# Altium PCB EE209_PCB.PcbDoc
Units mm, origin at the board's own origin, x right, y up, seen from the top; angles counter-clockwise.
Board outline 81.89 x 77.5 mm, 2 copper layers (Top Layer, Bottom Layer); 47 components, 37 nets, 169 pads, 0 vias.
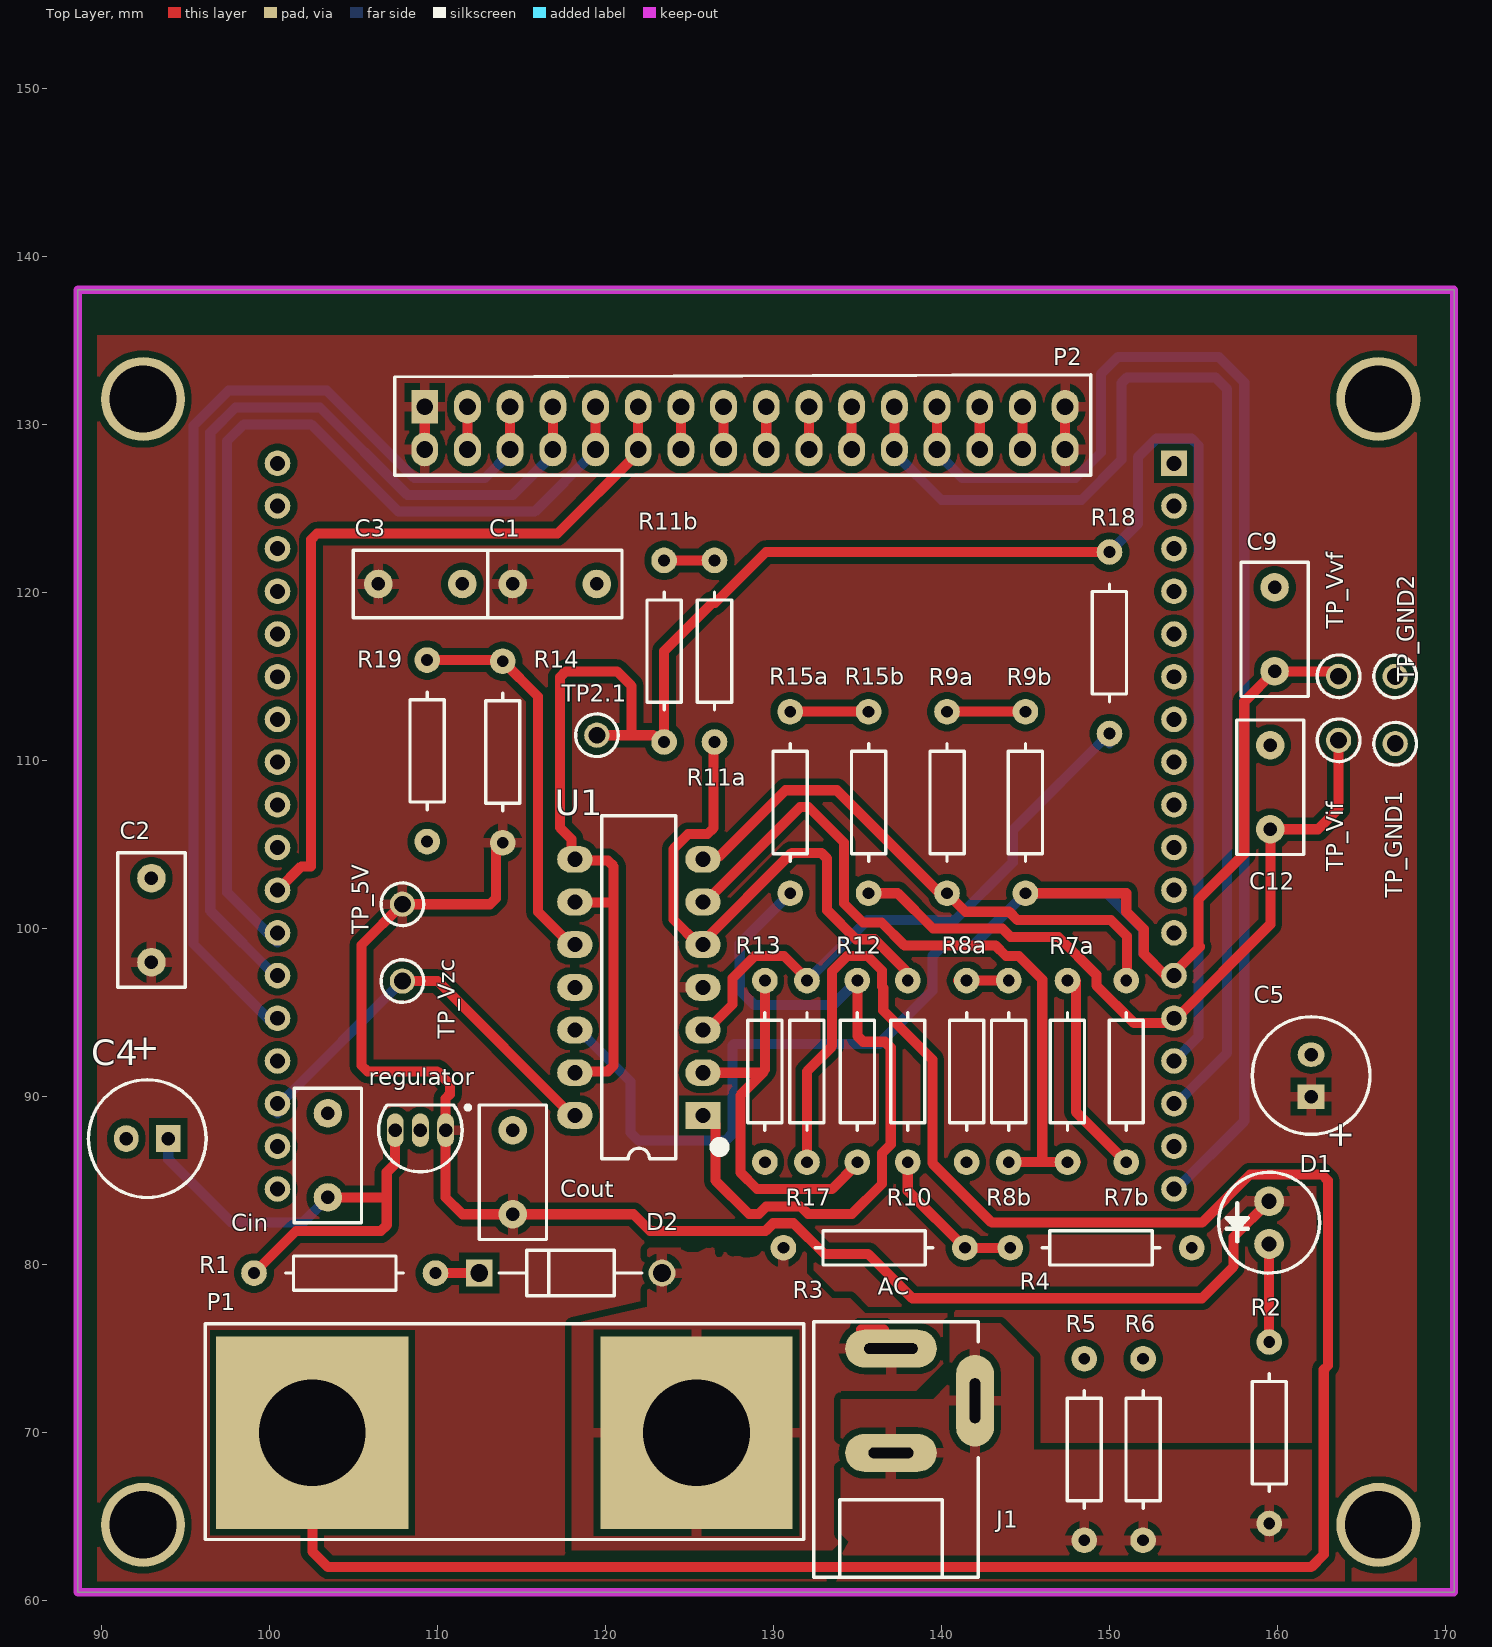
[diagram p0: Top Layer view]
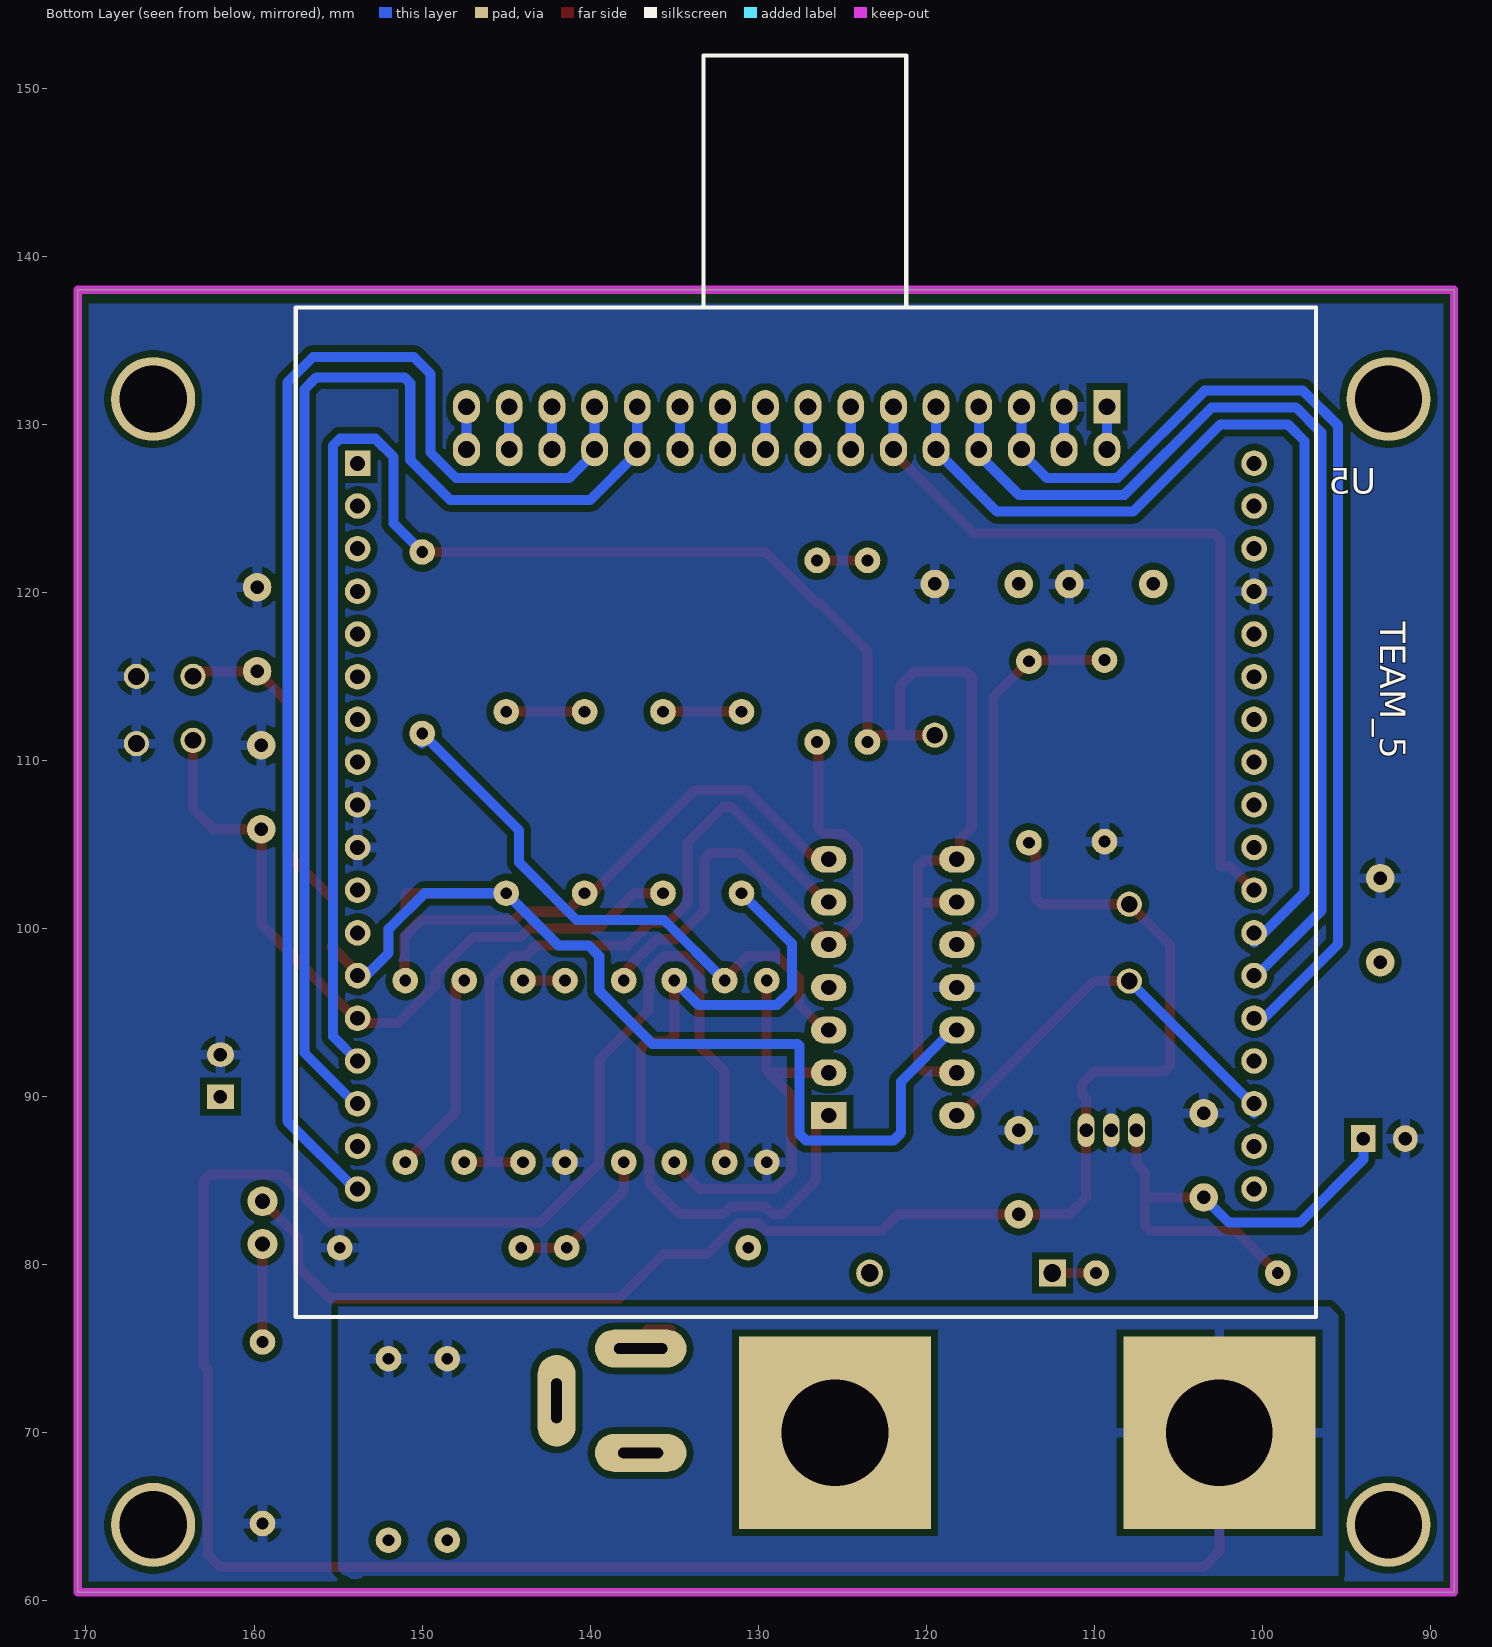
[diagram p1: Bottom Layer view, seen from below]

## Layer stack, top to bottom
Top Solder: solder mask 0.0102, Solder Resist, Dk 3.5
Top Layer: signal copper 0.0356
Dielectric 1: dielectric 0.32, FR-4, Dk 4.8
Bottom Layer: signal copper 0.0356
Bottom Solder: solder mask 0.0102, Solder Resist, Dk 3.5

## Board outline
88.605,60.5 170.5,60.5 170.5,138 88.605,138

## Design rules (kind name [scope] priority, off if disabled: settings)
BoardOutlineClearance [All] p1: gap=0.5 ignorepadtopadclearanceinfootprint=FALSE
Clearance [All] p1: gap=0.4 ignorepadtopadclearanceinfootprint=FALSE
Height [All] p1: minheight=0 maxheight=20 prefheight=12.7
HoleSize [All] p1: absolutevalues=TRUE maxlimit=10 minlimit=0.4 maxpercent=80.000 minpercent=20.000
MinimumAnnularRing [All] p1: minimumring=0.076
MinimumSolderMaskSliver [All] p1: minsoldermaskwidth=0.1
PlaneConnect [All] p1: planeconnectstyle=Relief reliefexpansion=0.6 reliefentries=4 reliefconductorwidth=0.6 reliefairgap=0.4
PolygonConnect PolygonConnect_1 [All] p1: connectstyle=Relief reliefconductorwidth=0.6 reliefentries=4 polygonreliefangle="90 Angle" airgapwidth=0.4
RoutingVias [All] p1: holewidth=0.6 width=1 viastyle="Through Hole" minholewidth=0.5 minwidth=0.8 maxholewidth=1 maxwidth=2
SMDToCorner [All] p1: distance=157480
SilkToSilkClearance [All] p1: silktosilkclearance=0.1
SilkToSolderMaskClearance [IsPad] p1: minsilkscreentomaskgap=0.1 clearancetoexposedcopper=TRUE
SolderMaskExpansion [All] p1: expansion=0.102 istentingtop=FALSE
Width [All] p1: maxlimit=10 minlimit=0.4 preferedwidth=0.6
24 further rules are at their usual default settings.

## Components (designator, comment, footprint, x,y, rotation, side; value= is the part's Value field where it differs from the comment)
C1 "*" CCAP-5P0 117,120.5 r0 top
C2 "*" CCAP-5P0 93,100.5 r90 top
C3 "*" CCAP-5P0 109,120.5 r0 top
C4 "*" "CAP-RAD-2.5mm Pitch" 92.75,87.5 r180 top
C5 "*" "CAP-RAD-2.5mm Pitch" 162,91.25 r90 top
C9 "1n" CCAP-5P0 159.822,117.802 r90 top
C12 "1n" CCAP-5P0 159.568,108.404 r90 top
Cin "47micro" CCAP-5P0 103.5,86.5 r90 top
Cout "10micro" CCAP-5P0 114.5,85.5 r90 top
D1 "Green" LED 159.5,82.5 r270 top
D2 "1N4007" 1N4007-MFG 117.938,79.5 r0 top
J1 "DC barrel jack" AC-Socket 137,69.004 r90 top value=socket
P1 "Dual Banana Plugs" "Dual Banana Plug" 114,70 r180 top
P2 "Display" Display 127.04,129.77 r180 top
R1 "33" AXIAL-0.4#1 104.5,79.5 r180 top
R2 "*" AXIAL-0.4#1 159.5,70 r90 top
R3 "22k" AXIAL-0.4#1 136,81 r180 top value=100k
R4 "1k" AXIAL-0.4#1 149.5,81 r180 top value=1k2
R5 "1" AXIAL-0.4#1 148.5,69 r90 top
R6 "1" AXIAL-0.4#1 152,69 r90 top
R7a "12k" AXIAL-0.4#1 147.5,91.5 r90 top value=100k
R7b "2.2k" AXIAL-0.4#1 151,91.5 r90 top
R8a "2.7k" AXIAL-0.4#1 141.5,91.5 r90 top
R8b "10k" AXIAL-0.4#1 144,91.5 r270 top
R9a "1k" AXIAL-0.4#1 140.333,107.5 r90 top
R9b "15k" AXIAL-0.4#1 145,107.5 r270 top
R10 "12k" AXIAL-0.4#1 138,91.5 r90 top value=10k
R11a "12k" AXIAL-0.4#1 126.5,116.5 r270 top value=100k
R11b "2.2k" AXIAL-0.4#1 123.5,116.5 r90 top
R12 "2.2k" AXIAL-0.4#2 135,91.5 r270 top value=100k
R13 "1k" AXIAL-0.4#1 129.5,91.5 r90 top value=10k
R14 "4.7K'" AXIAL-0.4#1 113.898,110.5 r270 top
R15a "1k" AXIAL-0.4#1 131,107.5 r90 top
R15b "15k" AXIAL-0.4#1 135.667,107.5 r270 top
R17 "1k" AXIAL-0.4#1 132,91.5 r90 top value=10k
R18 "2.2k" AXIAL-0.4#1 150,117 r270 top value=100k
R19 "3.3k" AXIAL-0.4#1 109.402,110.572 r90 top
regulator "L78L05ACZ" TO-92 109,88 r90 top
TP2.1 "5003" TP_TH 119.5,111.5 r90 top
TP_5V "5003" TP_TH 107.928,101.444 r90 top
TP_GND1 "5003" TP_TH 167,111 r90 top
TP_GND2 "5003" TP_TH 167,115 r90 top
TP_Vif "5003" TP_TH 163.632,111.198 r270 top
TP_Vvf "5003" TP_TH 163.632,115.008 r90 top
TP_Vzc "5003" TP_TH 107.928,96.872 r90 top
U1 "LM324" DIP-14 122,96.5 r180 top
U5 "ATmega328PB Xplained Mini Header" "ATmeg328P Xplained" 127.17,106.09 r180 bottom

## Footprints (in the part's own frame and the unit in brackets; to place one, negate y for a bottom-side part, rotate by r counter-clockwise, add the part's x,y. Pads: shape width x height; smd on the part's side, far side on the other; paste and mask are expansions set on the pad)
1N4007-MFG [mm]
  round 1.6 hole 1.05 paste-1000 mask+0: 1(5.438,0)
  rect 1.6x1.6 hole 1.05 paste-1000 mask+0: 2(-5.438,0)
  silkscreen extent -4.24,-1.35 4.24,1.35, body extent -6.34,-1.45 6.34,1.45, height 0.25
AC-Socket [mm]
  oval 2.25x5.45 hole 0.635 slot 3.175 at 90 deg: 1(6,0)
  oval 5.45x2.25 hole 0.635 slot 2.667 at 0 deg: 2(2.9,-5)
  oval 2.25x5.45 hole 0.635 slot 2.667 at 90 deg: 3(-0.2,0)
  silkscreen extent -7.6,-5.2 7.6,4.6, body extent -6.7,-5 6,4.2, height 10.5
"ATmeg328P Xplained" [mil]
  rect 60x60 hole 35: 1(-1050,850)
  round 60 hole 35: 2(-1050,750) 3(-1050,650) 4(-1050,550) 5(-1050,450) 6(-1050,350) 7(-1050,250) 8(-1050,150) 9(-1050,50) 10(-1050,-50) 11(-1050,-150) 12(-1050,-250) 13(-1050,-350) 14(-1050,-450) 15(-1050,-550) 16(-1050,-650) 17(-1050,-750) 18(-1050,-850) 19(1050,-850) 20(1050,-750) 21(1050,-650) 22(1050,-550) 23(1050,-450) 24(1050,-350) 25(1050,-250) 26(1050,-150) 27(1050,-50) 28(1050,50) 29(1050,150) 30(1050,250) 31(1050,350) 32(1050,450) 33(1050,550) 34(1050,650) 35(1050,750) 36(1050,850)
  silkscreen extent -1195,-1150 1195,1805, body extent -1201,-1150 1161,1845, height 452
AXIAL-0.4#1 [mm]
  round 1.524 hole 0.7: 1(-5.4,0) 2(5.4,0)
  silkscreen extent -3.5,-1.02 3.5,1.02, body extent -5.7,-1.3 5.7,1.3, height 2.7
AXIAL-0.4#2 [mm]
  round 1.524 hole 0.7: 1(5.4,0) 2(-5.4,0)
  silkscreen extent -3.5,-1.02 3.5,1.02, body extent -5.7,-1.3 5.7,1.3, height 2.7
"CAP-RAD-2.5mm Pitch" [mm] "Cap 6.3 X 11.2"
  rect 1.45x1.6 hole 0.8: 1(-1.25,0)
  oval 1.45x1.6 hole 0.8: 2(1.25,0)
  silkscreen extent -3.5,-3.5 3.5,3.5, body extent -3.15,-3.15 3.15,3.15, height 11.5
CCAP-5P0 [mm]
  round 1.7 hole 0.8: 1(-2.5,0) 2(2.5,0)
  silkscreen extent -4,-2 4,2, body extent -3.25,-1.5 3.25,1.5, height 6.5
DIP-14 [mm] "DIP; 14 Leads; Row Spacing 7.62 mm; Pitch 2.54 mm"
  rect 2.1x1.6 hole 0.9: 1(-3.81,7.62)
  oval 2.1x1.6 hole 0.9: 2(-3.81,5.08) 3(-3.81,2.54) 4(-3.81,0) 5(-3.81,-2.54) 6(-3.81,-5.08) 7(-3.81,-7.62) 8(3.81,-7.62) 9(3.81,-5.08) 10(3.81,-2.54) 11(3.81,0) 12(3.81,2.54) 13(3.81,5.08) 14(3.81,7.62)
  silkscreen extent -5.1,-10.2 2.2,10.2, body extent -5.07,-10.2 5.09,10.12, height 9.47
Display [mm]
  rect 1.6x2 hole 1: 1(17.78,-1.27)
  oval 1.6x2 hole 1: 2(17.78,1.27) 3(15.24,-1.27) 4(15.24,1.27) 5(12.7,-1.27) 6(12.7,1.27) 7(10.16,-1.27) 8(10.16,1.27) 9(7.62,-1.27) 10(7.62,1.27) 11(5.08,-1.27) 12(5.08,1.27) 13(2.54,-1.27) 14(2.54,1.27) 15(0,-1.27) 16(0,1.27) 17(-2.54,-1.27) 18(-2.54,1.27) 19(-5.08,-1.27) 20(-5.08,1.27) 21(-7.62,-1.27) 22(-7.62,1.27) 23(-10.16,-1.27) 24(-10.16,1.27) 25(-12.7,-1.27) 26(-12.7,1.27) 27(-15.24,-1.27) 28(-15.24,1.27) 29(-17.78,-1.27) 30(-17.78,1.27) 31(-20.32,-1.27) 32(-20.32,1.27)
  silkscreen extent -21.84,-3.18 19.56,2.79, body extent -32.6,-50 26.4,4, height 13
"Dual Banana Plug" [mm] "Connector; 2 Position"
  rect 11.43x11.43 hole 6.35: 1(-11.43,0) 2(11.43,0)
  silkscreen extent -17.8,-6.48 17.8,6.35, body extent -17.38,-5.99 17.43,5.99, height 5.5
LED [mil]
  round 70 hole 35.43: 1(-50,0) 2(50,0)
  silkscreen extent -118,-118 118,118, body extent -98,-98 98,98, height 413
TO-92 [mm] "TO, Flat Index; 3 In-Line, Axial Leads; Body Dia. 4.5mm; Leads 0.51 x 0.48 mm (max)"
  oval 2x1 hole 0.8: 1(0,-1.5) 2(0,0) 3(0,1.5)
  silkscreen extent -2.48,-2.96 1.5,2.48, body extent -2.4,-2.4 1.53,2.4, height 6.73
TP_TH [mm] "Test Point, Through Hole, Dia 2.54mm"
  round 1.5 hole 1: 1(0,0)
  silkscreen extent -1.27,-1.27 1.27,1.27, body extent -1.27,-1.27 1.27,1.27, height 4.57

## Part data
C1 C2 C3 C9 C12 Cin Cout: library part CerCap_TH_5P0, "TH ceramic capacitor with 5mm pitch"
C4 C5: library part ElecCap_TH_2P0, "Electrolytic capacitor with radial package, 2mm pitch and 5.2mm diameter", LatestRevisionDate=17-Jul-2002, LatestRevisionNote="Re-released for DXP Platform.", PackageDescription="Polarized Capacitor; 2 Leads", PackageReference=POLAR0.8, Published=8-Jun-2000, Publisher="Altium Limited"
D1: library part LED_TH_2P54, "Typical throughole GaAs LED with 2.54mm pitch", Manufacturer="Generic Components", Class I=Optoelectronic, Class II=LED, Published=8-Jun-2000, Publisher="Altium Limited", Revision="July-2002: Re-released for DXP Platform."
D2: library part 1N4007_TH_4AX0, "1N4007 1000V standard axial diode", Supplier Part Number 1=1N4007RLGOSCT-ND, ComponentLink1Description=https://www.fairchildsemi.com/datasheets/1N/1N914.pdf, ComponentLink1URL=https://www.fairchildsemi.com/datasheets/1N/1N914.pdf, Supplier 1=Digi-Key
J1: library part AC_Input, "DC barrel jack connection to AC source"
P1: library part AC_Output, "Dual banana plugs connection to the AC load", LatestRevisionDate=17-Jul-2002, LatestRevisionNote="Re-released for DXP Platform.", Publisher="Altium Limited"
P2: "16-Pin Header Connecting Display"
R1 R2 R3 R4 R5 R6 R7a R7b R8a R8b R9a R9b R10 R11a R11b R12 R13 R14 R15a R15b R17 R18 R19: library part Res_TH_0AX4, "Through hole resistor", ComponentLink1Description=http://www.royalohm.com/pdf/product2017/PrecisionMetalMF.pdf, LatestRevisionDate=17-Jul-2002, LatestRevisionNote="Re-released for DXP Platform.", PackageReference=AXIAL-0.4, Published=8-Jun-2000, Publisher="Altium Limited"
regulator: library part L78L05_TH_TO92, "Voltage Regulator 5V", Base Part Number=LM78L05, Current - Output=100mA, Manufacturer="ON Semiconductor", Manufacturer Part Number=LM78L05ACZX, Operating Temperature="-40°C ~ 125°C", Package / Case="TO-226-3, TO-92-3 (TO-226AA) (Formed Leads)", Supplier Device Package=TO-92-3, Supplier Part Number 1=LM78L05ACZXCT-ND, Voltage - Input (Max)=30V, Voltage - Output (Max)=-, Voltage - Output (Min/Fixed)=5V, Category="Integrated Circuits (ICs)", ComponentLink1Description=https://www.fairchildsemi.com/datasheets/MC/MC78L05A.pdf, ComponentLink1URL=https://www.fairchildsemi.com/datasheets/MC/MC78L05A.pdf, Control Features=-, Mounting Type="Through Hole", Output Configuration=Positive, Output Type=Fixed, Packaging="Cut Tape (CT)", Part Status=Active, Pricing 1="1=0.69, 10=0.517, 100=0.3226, 500=0.2207, 1000=0.16976 (NZD)", Protection Features="Over Temperature, Short Circuit", PSRR="80dB (120Hz)", RoHS="RoHS Compliant", Stock 1=7782, Supplier 1=Digi-Key, Voltage Dropout (Max)=-
TP2.1 TP_5V TP_GND1 TP_GND2 TP_Vif TP_Vvf TP_Vzc: library part TestPoint, "Test Point, Orange, 1-Pin THD, RoHS", Forward Current="3 A", Forward Voltage="1.08 V", Max Operating Temperature="150 degC", Max Surge Current="80 A", Min Operating Temperature="-65 degC", Package Quantity=500, Peak Reverse Current="600 uA", ComponentLink1Description="Manufacturer URL", ComponentLink1URL=http://www.keyelco.com/, ComponentLink2Description=Datasheet, ComponentLink2URL=http://keyelco.com/userAssets/file/M65p56.pdf, DatasheetVersion=Jun-15, Diameter="5.3 mm", Height="0.25 inch", Length="9.5 mm", Mount="Through Hole", PackageDescription="1-Pin Through Hole Device, Dia 2.54 mm", PackageReference=5003, Packaging=Bulk, Pins=2, Radiation Hardening=No, REACH SVHC="No SVHC", RoHSCompliant=true, Weight="0.01 lb", Width="0.25 inch"
U1: library part LM324N_TH_DIP16, "IC OPAMP GP 14DIP", Current - Supply=1mA, Manufacturer="ON Semiconductor", Manufacturer Part Number=LM324N, Operating Temperature="0°C ~ 70°C", Package / Case="14-DIP (0.300\", 7.62mm)", Supplier Device Package=14-DIP, Supplier Part Number 1=LM324NFS-ND, Voltage - Supply, Single/Dual (±)="3 V ~ 32 V, ±1.5 V ~ 16 V", Amplifier Type="General Purpose", Base Part Number=LM324, Category="Integrated Circuits (ICs)", ComponentLink1Description=https://www.fairchildsemi.com/datasheets/LM/LM2902.pdf, ComponentLink1URL=https://www.fairchildsemi.com/datasheets/LM/LM2902.pdf, Mounting Type="Through Hole", Output Type=-, Packaging=Tube, Part Status=Active, Pricing 1="1=0.9, 10=0.775, 100=0.5789, 500=0.45482, 1000=0.35145 (NZD)", RoHS="RoHS Compliant", Slew Rate=-, Stock 1=2900, Supplier 1=Digi-Key
U5: library part ATmega328PBXplained_TH, "Dual 18-pin headers connecting to ATmega328PB Xplained Mini", Manufacturer="Microchip Technology", Manufacturer Part Number=ATMEGA328PB-XMINI, Operating System=-, Supplier Part Number 1=ATMEGA328PB-XMINI-ND, Board Type="Evaluation Platform", Category="Development Boards, Kits, Programmers", ComponentLink1Description=http://www.microchip.com/mymicrochip/filehandler.aspx?ddocname=en589665, ComponentLink1URL=http://www.microchip.com/mymicrochip/filehandler.aspx?ddocname=en589665, Contents=Board(s), Core Processor=AVR, For Use With/Related Products=ATmega328P, Mounting Type=Fixed, Part Status=Active, Platform="ATmega328P Xplained Mini", Pricing 1="1=15.11 (NZD)", RoHS="RoHS Compliant", Stock 1=454, Supplier 1=Digi-Key, Type="MCU 8-Bit"

## Free pads (board coordinates)
  round 5 hole 4: 2(92.5,64.52) 2(92.5,131.5) 2(166,64.52) 2(166,131.5)

## Nets (pads, with @x,y where several pads share a name; then routed paths per layer and width w, separated by ;. In a path a pad name is that pad's centre, name@x,y a point inside that pad or via, vN(x,y) a via of type N, cw(c..) or ccw(c..) an arc to the next point about the centre after c; other vN are vias at no path point)
2.1V: R11b.1 R18.1 TP2.1.1 U1.8 U1.9 U1.13 U5.15 | length 124
  Top Layer w0.6: U1.8 117.981,104.329 117.981,105.32 117.301,106 117.301,114.95 117.653,115.301 120.699,115.301 121.563,114.437 121.563,111.5 ; U1.13@118.3,91.388 118.412,91.5 120.149,91.5 120.5,91.851 120.5,101.548 ; U1.9@118.3,101.548 120.5,101.548 ; U1.8@118.337,104.051 120.149,104.051 120.5,103.699 120.5,101.548 ; TP2.1.1 121.563,111.5 ; R18.1 129.568,122.4 126.529,119.362 126.362,119.362 123.5,116.5 R11b.1 123.25,111.1 122.85,111.5 121.563,111.5
  Bottom Layer w0.6: R18.1 151.707,124.107 151.707,128.061 152.788,129.142 154.892,129.142 155.302,128.732 155.302,93.582 U5.15
5V: C1.1 C2.1 C3.1 C5.1 Cout.1 D1.1 P2.1 P2.2 P2.31 P2.32 R14.2 regulator.1 TP_5V.1 U1.4 | length 97.6
  Top Layer w0.6: P2.2 P2.1 ; R14.2@113.5,105.1 113.5,101.795 113.149,101.444 TP_5V.1 105.5,99.016 105.5,91.851 105.851,91.5 110,91.5 110.751,90.749 110.751,90.136 110.5,89.885 regulator.1 110.5,84 111.5,83 112.853,83 Cout.1 121.677,83 122.665,82.012 129.545,82.012 129.994,82.462 131.206,82.462 133.04,80.628 135.644,80.628 138.272,78 155.5,78 157.381,79.881 157.381,81.651 D1.1 ; P2.32 P2.31
  Bottom Layer w0.6: P2.2 P2.1 ; P2.32 P2.31
DS1: P2.5 P2.6 U5.23 | length 65.3
  Top Layer w0.6: P2.6 P2.5
  Bottom Layer w0.6: U5.23@100.21,94.37 95.5,99.08 95.5,129.086 95.5,129.914 97.586,132 103.439,132 108.639,126.8 112.84,126.8 114.34,128.3 P2.6 P2.5
DS2: P2.7 P2.8 U5.24 | length 63.6
  Top Layer w0.6: P2.8 P2.7
  Bottom Layer w0.6: U5.24@100.5,97.06 96.5,101.06 96.5,129.003 96.5,129.5 98,131 103.024,131 108.224,125.8 114.5,125.8 116.88,128.18 P2.8 P2.7
DS3: P2.9 P2.10 U5.25 | length 62.2
  Top Layer w0.6: P2.10 P2.9
  Bottom Layer w0.6: U5.25@100.5,99.16 97.5,102.16 97.5,129 98.5,130 102.5,130 107.7,124.8 115.8,124.8 119.42,128.42 P2.10 P2.9
DS4: P2.11 P2.12 U5.26 | length 48.9
  Top Layer w0.6: U5.26 101.92,103.7 102.5,103.7 102.5,123.149 102.851,123.5 117.16,123.5 P2.12@121.96,128.3 ; P2.12 P2.11
  Bottom Layer w0.6: P2.12@121.96,128.3 P2.12 P2.11
GND: C1.2 C2.2 C3.2 C4.2 C5.2 C9.2 C12.2 Cin.2 Cout.2 J1.2 J1.3 P2.3 P2.4 R2.1 R4.1 R5.1 R6.1 R8a.1 R13.1 R19.1 regulator.2 TP_GND1.1 TP_GND2.1 U1.11 U5.9 U5.10 U5.33 | length 7.6
  Top Layer w0.6: regulator.2 regulator.2@109,88.608 ; P2.4 P2.3 ; J1.2@142,71.307 142,72.5 J1.2@142.5,72
  Bottom Layer w0.6: P2.4 P2.3
Imeas: C12.1 R15b.2 TP_Vif.1 U5.14 | length 43.7
  Top Layer w0.6: R15b.2 137.4,102.1 139.5,100 143.618,100 144.118,99.5 146.968,99.5 149.217,97.251 149.217,96.616 151.466,94.366 U5.14@153.366,94.366 ; U5.14@153.84,94.52 159.568,100.248 C12.1 162.404,105.904 163.632,107.132 TP_Vif.1
LED1: P2.13 P2.14 | length 5.1
  Top Layer w0.6: P2.14 P2.13
  Bottom Layer w0.6: P2.14 P2.13
LED2: P2.15 P2.16 | length 5.1
  Top Layer w0.6: P2.16 P2.15
  Bottom Layer w0.6: P2.16 P2.15
LED3: P2.17 P2.18 | length 5.1
  Top Layer w0.6: P2.18 P2.17
  Bottom Layer w0.6: P2.18 P2.17
LED4: P2.19 P2.20 | length 5.1
  Top Layer w0.6: P2.20 P2.19
  Bottom Layer w0.6: P2.20 P2.19
NetC4_1: C4.1 Cin.1 R1.2 regulator.3 | length 31.5
  Top Layer w0.6: R1.2 101.6,82 106.649,82 107,82.351 107,83.891 ; Cin.1 106.891,84 107,83.891 ; regulator.3@107.423,87.923 regulator.3 107.5,86 107,85.5 107,83.891
  Bottom Layer w0.6: C4.1 94,86.27 97.77,82.5 102,82.5 Cin.1
NetD1_2: D1.2 R2.2 | length 5.8
  Top Layer w0.6: R2.2 D1.2
NetD2_2: D2.2 R1.1 | length 2.6
  Top Layer w0.6: R1.1 D2.2
NetR7a_1: R7a.1 R8b.2 U1.6 | length 43.6
  Top Layer w0.6: U1.6@125.952,101.58 131.599,107.227 132.096,107.227 134.205,105.118 134.205,101.494 135.337,100.362 136.434,100.362 137.796,99 143.204,99 143.842,98.362 144.606,98.362 146,96.968 146,86.1 ; R8b.2 146,86.1 ; R7a.1@148,86.1 146,86.1
NetR7a_2: R7a.2 R7b.1 | length 12
  Top Layer w0.6: R7a.2@148,96.9 148,89.1 R7b.1
NetR8a_2: R8a.2 R8b.1 | length 3
  Top Layer w0.6: R8a.2@141,96.9 R8b.1
NetR9a_2: R9a.2 R9b.1 | length 4.7
  Top Layer w0.6: R9a.2 R9b.1
NetR10_2: R10.2 R11a.2 U1.5 | length 34.3
  Top Layer w0.6: U1.5@125.726,99.124 131.101,104.5 132.853,104.5 133.205,104.149 133.205,101.08 134.923,99.362 136.02,99.362 137.823,97.559 137.823,97.077 R10.2 ; U1.5@125.81,99.061 U1.5 125.56,99.04 124.06,100.54 124.06,104.741 124.939,105.62 126.082,105.62 126.434,105.971 R11a.2@126.434,111.1
NetR11a_1: R11a.1 R11b.2 | length 3
  Top Layer w0.6: R11b.2 R11a.1
NetR12_1: R12.1 R13.2 U1.2 | length 23.6
  Top Layer w0.6: U1.2 129.32,91.42 129.5,91.6 R13.2 ; 129.384,91.42 128.038,90.074 128.038,85.494 129.032,84.5 133.5,84.5 135,86 R12.1
NetR14_1: R14.1 R19.2 U1.10 | length 23.8
  Top Layer w0.6: R19.2 R14.1@113.898,115.972 ; R14.1 116,113.798 116,101 117.96,99.04 U1.10
  Bottom Layer w0.6: R19.2 R19.2@109.438,115.936 ; R14.1@113.464,115.936 R14.1@113.5,115.9 ; U1.10@117.843,99.008 U1.10@118.3,99.008
NetR15a_2: R15a.2 R15b.1 | length 4.7
  Top Layer w0.6: R15a.2 R15b.1
NetR17_2: R17.2 R18.2 U1.3 | length 35.4
  Top Layer w0.6: U1.3 126.06,93.96 127.573,95.473 127.573,97.04 128.894,98.362 130.638,98.362 132,97 R17.2
  Bottom Layer w0.6: R17.2 135.609,100.509 140.81,100.509 144.243,103.942 144.243,105.843 R18.2 R18.2@150,111
OE: P2.27 P2.28 | length 5.1
  Top Layer w0.6: P2.28 P2.27
  Bottom Layer w0.6: P2.28 P2.27
SH_CP: P2.23 P2.24 U5.16 | length 76.2
  Top Layer w0.6: P2.24 P2.23
  Bottom Layer w0.6: P2.23 P2.24 137.2,128.3 140,125.5 148.33,125.5 150.707,127.877 150.707,132.441 151.059,132.793 156.293,132.793 157,132.086 157,92.6 U5.16@153.84,89.44
SH_DH: P2.29 P2.30 | length 5.1
  Top Layer w0.6: P2.30 P2.29
  Bottom Layer w0.6: P2.30 P2.29
SH_ST: P2.25 P2.26 U5.18 | length 80.4
  Top Layer w0.6: P2.26 P2.25
  Bottom Layer w0.6: P2.25 139.74,128.3 141.24,126.8 147.981,126.8 149.5,128.319 149.5,133 150.5,134 156.5,134 158.018,132.482 158.018,88.538 U5.18@153.84,84.36
SRCLR: P2.21 P2.22 | length 5.1
  Top Layer w0.6: P2.22 P2.21
  Bottom Layer w0.6: P2.22 P2.21
Vac: D2.1 J1.1 P1.1 R3.2 | length 12.8
  Top Layer w0.6: P1.1@123.376,72.054 P1.1 P1.1@126.598,71.168 ; P1.1@126.5,71.5 P1.1@129.5,74.5 ; 135.217,76.148 136.582,76.148 ; J1.1@135.4,75.5 137,75.5 J1.1@136.5,75
  Top Layer w1: P1.1@124.16,73.81 P1.1@124.414,73.556
Vio: R12.2 R15a.1 U1.1 | length 45
  Top Layer w0.6: U1.1 126.06,88.88 126.56,88.38 126.56,85 128.548,83.012 129.131,83.012 129.58,83.462 131.62,83.462 132.069,83.012 134.673,83.012 136.462,84.801 136.462,86.63 136.984,87.152 136.984,92.913 136.633,93.265 135.351,93.265 135,93.616 R12.2
  Bottom Layer w0.6: R15a.1 128,99.1 128,96.332 128.894,95.438 133.538,95.438 R12.2
Vis: P1.2 R5.2 R6.2 R17.1 | length 145
  Top Layer w0.6: P1.2 102.57,62.93 103.5,62 162,62 162.75,62.75 162.75,73.75 163,74 163,85 162.641,85.359 158.359,85.359 155.5,82.5 143,82.5 139.462,86.038 139.462,92.201 136.538,95.125 136.538,96.462 136.462,96.538 136.462,97.506 135.606,98.362 134.394,98.362 133.5,97.468 133.5,93 132,91.5 R17.1
Vmeas: C9.1 R9b.2 TP_Vvf.1 U1.12 U5.13 | length 89.9
  Top Layer w0.6: R9b.2 151,102.1 151,101 152.038,99.962 152.038,98.494 153.332,97.2 U5.13 ; U5.13@154.106,97.638 155.382,98.914 ; 155.302,98.994 155.302,101.734 158.018,104.45 158.018,113.498 C9.1 163.094,115.302 163.388,115.008 TP_Vvf.1
  Bottom Layer w0.6: U1.12 118.44,93.96 121.5,90.9 121.5,87.851 121.971,87.38 125.6,87.38 127.15,87.38 127.56,87.79 127.56,93.037 127.662,93.139 136.307,93.139 139.462,96.294 139.462,98.355 140.107,99 141.9,99 R9b.2 149.851,102.1 151.951,100 152,100 152,98.532 U5.13@153.807,96.726
Vvo: R7b.2 R9a.1 U1.7 | length 33.1
  Top Layer w0.6: U1.7 126.001,104.311 126.811,104.311 130.727,108.227 133.773,108.227 R9a.1@140.117,101.883 ; R9a.1 141.433,101 144.032,101 144.532,100.5 150.086,100.5 151.038,99.548 151.038,96.938 R7b.2
Vvs: R3.1 R4.2 R10.1 | length 9.2
  Top Layer w0.6: R10.1 138,84.4 R3.1 R4.2
Vzc: TP_Vzc.1 U1.14 U5.21 | length 24.6
  Top Layer w0.6: TP_Vzc.1 110.026,96.872 118.05,88.848 U1.14@118.3,88.848
  Bottom Layer w0.6: U5.21@100.5,89 100.677,89.177 100.677,89.62 TP_Vzc.1
pads on no net: U5.1 U5.2 U5.3 U5.4 U5.5 U5.6 U5.7 U5.8 U5.11 U5.12 U5.17 U5.19 U5.20 U5.22 U5.27 U5.28 U5.29 U5.30 U5.31 U5.32 U5.34 U5.35 U5.36

## Polygon pours and split planes (outlines as drawn)
Vis on Bottom Layer "NONET_L01_P-001" (solid, pour order 3): 95.5,77 96,77.5 155,77.5 155,61.5 cw(c154.947,61.627) 154.905,61.757 cw(c154.493,61.96) 154.5,61.5 cw(c153.953,62.12) 153.649,61.351 153.5,61.5 95.5,61.5
GND on Bottom Layer "GND_L02_P014" (solid, pour order 14): 88.605,137.16 170,137.16 170,61 88.605,61
5V on Top Layer "5V" (solid, pour order 13): 89.789,135.294 168.289,135.294 168.289,60.794 89.789,60.794
GND on Top Layer "GND_L01_P-001" (solid, pour order 7): 134.5,63.5 134,64 134,72 139.5,72 140.5,73 140.5,76.5 143.5,76.5 145.5,74.5 145.5,69 163.5,69 164,68.5 164,61 133.792,61 133.292,61.5
Vac on Top Layer "VAC_L01_P-001" (solid, pour order 12): 122.5,77.5 122.5,79 122.5,80.879 122.621,81 124.5,81 124.5,80.924 ccw(c125.193,82.084) 126,81 ccw(c126.131,81.628) 126.484,81.092 ccw(c133.543,81.573) 126.527,80.657 ccw(c126.778,80.689) 127.021,80.617 ccw(c87.465,92.347) 127.159,81.092 ccw(c127.61,80.953) 127.684,80.487 cw(c127.869,79.318) 128.086,80.481 ccw(c128.509,81.993) 128.951,80.487 ccw(c128.268,81.719) 129.5,81.036 129.5,81.5 130,82 131,82 132,81 132,79.5 133.5,78 134.583,78 135.483,77.1 140.356,77.1 140.356,74.356 138.5,72.5 134,72.5 134,63.5 133.5,63 118,63 118,76.44 118.037,76.477

## Keep-outs
Keep-Out Layer:
  the board outline again, w0.5

## Silkscreen, mask and mechanical layers (free items; w line width, h text height)
Top Overlay:
  text "AC" at 136.2,78.2 h1
Bottom Overlay:
  text "TEAM_5" at 92.992,118.246 h1.52 r90
Mechanical 1:
  the board outline again, w0.5

## Text inside footprints (layer, text, board x,y; h text height)
C4: Top Overlay "+" at 93.5,93.5 h1.5 r180
C5: Top Overlay "+" at 164.4,86.85 h1.5 r90